# Altium PCB PCB2.PcbDoc
Units mm, origin at the board's own origin, x right, y up, seen from the top; angles counter-clockwise.
Board outline 90 x 90 mm, 2 copper layers (Top Layer, Bottom Layer); 25 components, 45 nets, 174 pads, 7 vias.
Unrouted connection lines stored in the file: 56.
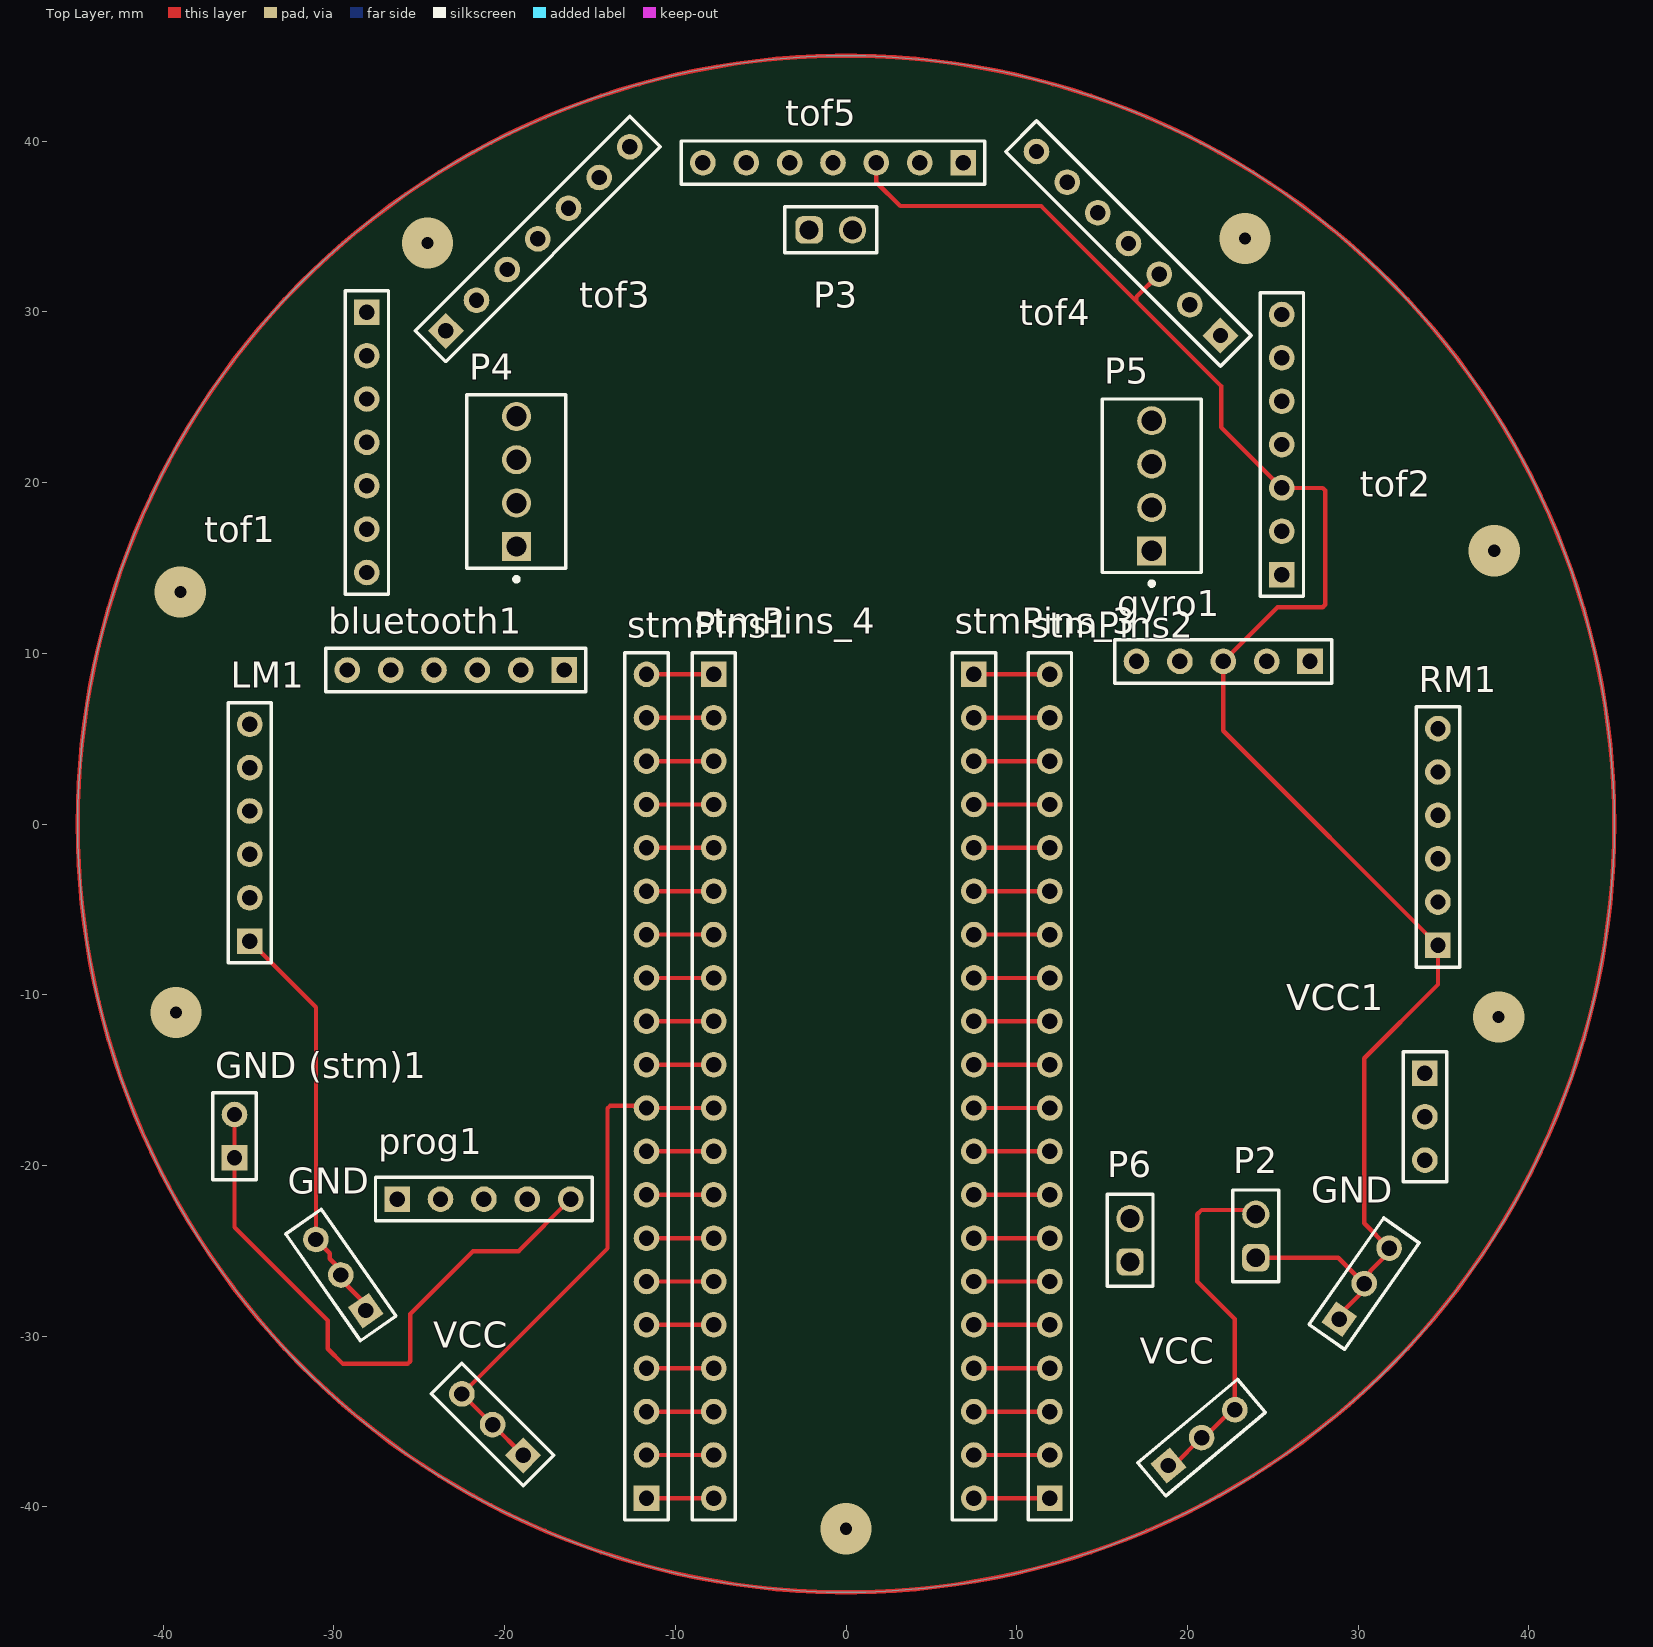
[diagram p0: Top Layer view]
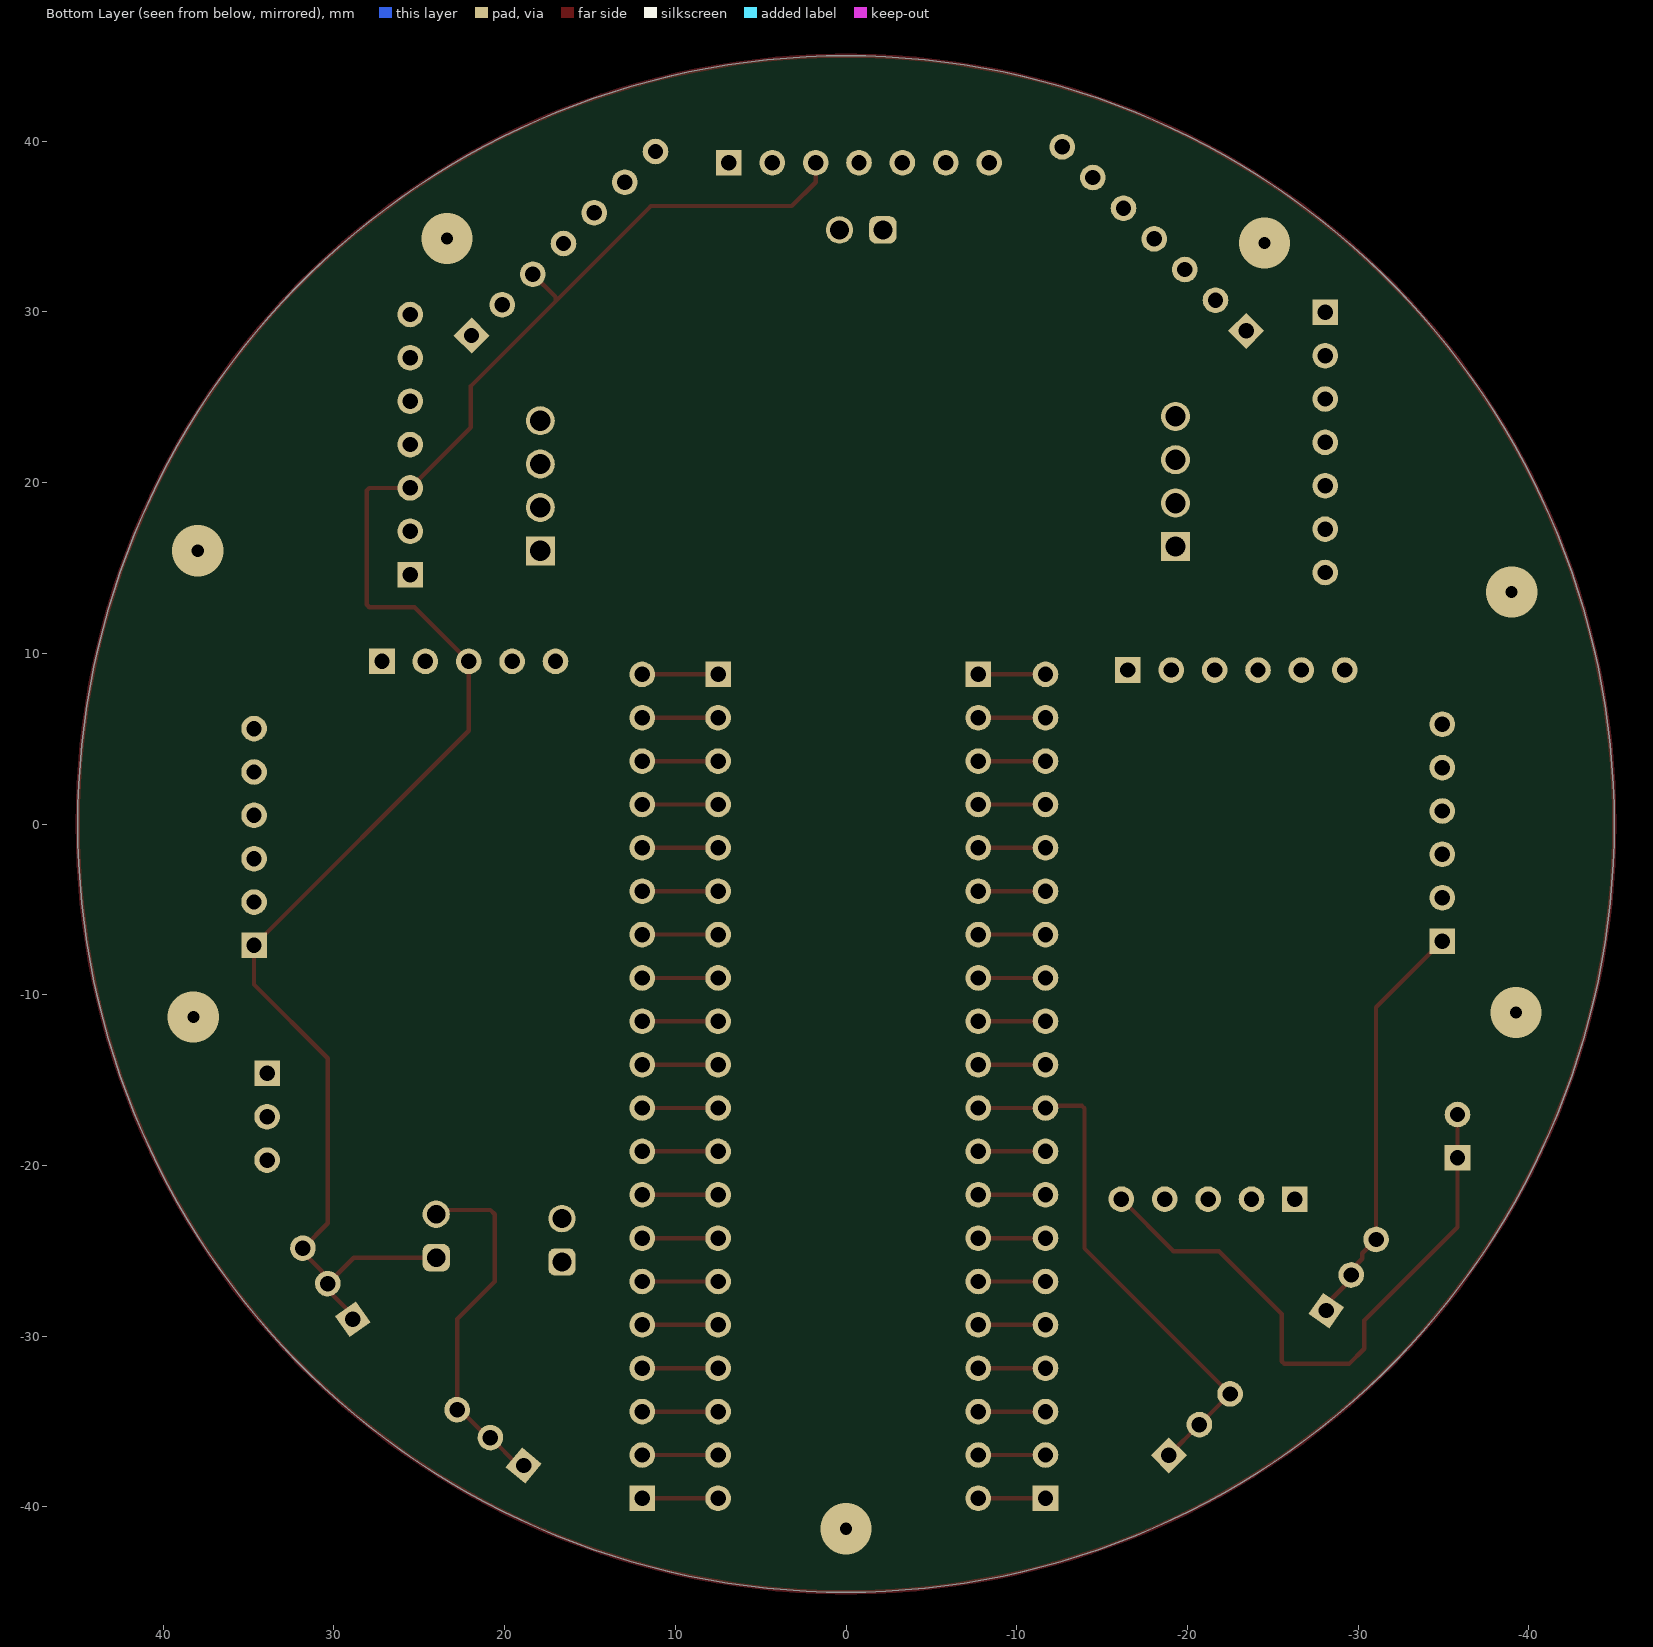
[diagram p1: Bottom Layer view, seen from below]

## Layer stack, top to bottom
Top Solder: solder mask 0.0102, Solder Resist, Dk 3.5
Top Layer: signal copper 0.0356
Dielectric 1: dielectric 0.32, FR-4, Dk 4.8
Bottom Layer: signal copper 0.0356
Bottom Solder: solder mask 0.0102, Solder Resist, Dk 3.5

## Board outline
-45,0 ccw(c0,0) 0,-45 ccw(c0,0) 45,0 ccw(c0,0) 0,45 ccw(c0,0)

## Design rules (kind name [scope] priority, off if disabled: settings)
Clearance [All] p1: gap=0.254 ignorepadtopadclearanceinfootprint=FALSE except(0: Arc-Hole Track-Hole SMDPad-Hole THPad-Hole Via-Hole Fill-Hole Poly-Hole Region-Hole Text-Hole)
PolygonConnect [All] p1: connectstyle=Relief reliefconductorwidth=0.254 reliefentries=4 polygonreliefangle="90 Angle" airgapwidth=0.254
RoutingVias [All] p1: holewidth=0.711 width=1.27 viastyle="Through Hole" minholewidth=0.711 minwidth=1.27 maxholewidth=0.711 maxwidth=1.27
SolderMaskExpansion [All] p1: expansion=0.102 istentingtop=FALSE
Width [All] p1: maxlimit=0.254 minlimit=0.254 preferedwidth=0.254
30 further rules are at their usual default settings.

## Classes and differential pairs
component class Sheet1: bluetooth1 GND "GND " "GND (stm)1" gyro1 LM1 prog1 RM1 stm1 stmPins1 stmPins2 stmPins_3 stmPins_4 tof1 tof2 tof3 tof4 tof5 VCC VCC1

## Components (designator, comment, footprint, x,y, rotation, side; value= is the part's Value field where it differs from the comment)
bluetooth1 "Header 6" HDR1X6 -16.51,9.017 r180 top
GND "Header 3" HDR1X3 28.896,-29.005 r55 top
GND "Header 3" HDR1X3 -28.134,-28.497 r125 top
"GND (stm)1" "Header 2" HDR1X2 -35.814,-19.558 r90 top
gyro1 "Header 5" HDR1X5 27.178,9.525 r180 top
LM1 "Header 6" HDR1X6 -34.925,-6.858 r90 top
P2 "61300211121" 61300211121 24.003,-24.13 r90 top
P3 "61300211121" 61300211121 -0.889,34.798 r0 top
P4 "22-27-2041" MOLX-22-27-2041_V -19.304,20.066 r270 top
P5 "22-27-2041" MOLX-22-27-2041_V 17.907,19.812 r270 top
P6 "61300211121" 61300211121 16.637,-24.384 r90 top
prog1 "Header 5" HDR1X5 -26.289,-21.971 r0 top
RM1 "Header 6" HDR1X6 34.671,-7.112 r90 top
stmPins1 "Header 20" HDR1X20 -11.684,-39.497 r90 top
stmPins2 "Header 20" HDR1X20 11.938,-39.497 r90 top
stmPins_3 "Header 20" HDR1X20 7.493,8.763 r270 top
stmPins_4 "Header 20" HDR1X20 -7.747,8.763 r270 top
tof1 "Header 7" HDR1X7 -28.067,29.972 r270 top
tof2 "Header 7" HDR1X7 25.527,14.605 r90 top
tof3 "Header 7" HDR1X7 -23.44,28.884 r45 top
tof4 "Header 7" HDR1X7 21.934,28.612 r135 top
tof5 "Header 7" HDR1X7 6.858,38.735 r180 top
VCC "Header 3" HDR1X3 -18.905,-36.975 r135 top
VCC "Header 3" HDR1X3 18.882,-37.574 r40 top
VCC1 "Header 3" HDR1X3 33.909,-14.605 r270 top

## Footprints (in the part's own frame and the unit in brackets; to place one, negate y for a bottom-side part, rotate by r counter-clockwise, add the part's x,y. Pads: shape width x height; smd on the part's side, far side on the other; paste and mask are expansions set on the pad)
61300211121 [mm] "Pin Header, pitch 2.54 mm, THT, Vertical, single row, 2p"
  rrect50% 1.6x1.6 hole 1.1: 1(-1.27,0)
  round 1.6 hole 1.1: 2(1.27,0)
  silkscreen extent -2.69,-1.34 2.69,1.34, body extent -2.54,-1.27 2.54,1.27, height 8.57
HDR1X2 [mm] "Connector; Header; 2 Position"
  rect 1.5x1.5 hole 0.9: 1(0,0)
  round 1.5 hole 0.9: 2(2.54,0)
  silkscreen extent -1.27,-1.27 3.81,1.27
HDR1X3 [mm] "Connector; Header; 3 Position"
  rect 1.5x1.5 hole 0.9: 1(0,0)
  round 1.5 hole 0.9: 2(2.54,0) 3(5.08,0)
  silkscreen extent -1.27,-1.27 6.35,1.27
HDR1X5 [mm] "Connector; Header; 5 Position"
  rect 1.5x1.5 hole 0.9: 1(0,0)
  round 1.5 hole 0.9: 2(2.54,0) 3(5.08,0) 4(7.62,0) 5(10.16,0)
  silkscreen extent -1.27,-1.27 11.43,1.27
HDR1X6 [mm] "Connector; Header; 6 Position"
  rect 1.5x1.5 hole 0.9: 1(0,0)
  round 1.5 hole 0.9: 2(2.54,0) 3(5.08,0) 4(7.62,0) 5(10.16,0) 6(12.7,0)
  silkscreen extent -1.27,-1.27 13.97,1.27
HDR1X7 [mm] "Connector; Header; 7 Position"
  rect 1.5x1.5 hole 0.9: 1(0,0)
  round 1.5 hole 0.9: 2(2.54,0) 3(5.08,0) 4(7.62,0) 5(10.16,0) 6(12.7,0) 7(15.24,0)
  silkscreen extent -1.27,-1.27 16.51,1.27
HDR1X20 [mm] "Connector; Header; 20 Position"
  rect 1.5x1.5 hole 0.9: 1(0,0)
  round 1.5 hole 0.9: 2(2.54,0) 3(5.08,0) 4(7.62,0) 5(10.16,0) 6(12.7,0) 7(15.24,0) 8(17.78,0) 9(20.32,0) 10(22.86,0) 11(25.4,0) 12(27.94,0) 13(30.48,0) 14(33.02,0) 15(35.56,0) 16(38.1,0) 17(40.64,0) 18(43.18,0) 19(45.72,0) 20(48.26,0)
  silkscreen extent -1.27,-1.27 49.53,1.27
MOLX-22-27-2041_V [mm] "CONN, 4-Leads, Body 10.16x5.8mm, Pitch 2.54mm"
  rect 1.7x1.7 hole 1.19: 1(3.81,0)
  round 1.7 hole 1.19: 2(1.27,0) 3(-1.27,0) 4(-3.81,0)
  silkscreen extent -5.08,-2.9 5.85,2.9, body extent -5.08,-2.9 5.08,2.9, height 11.7

## Part data
bluetooth1 LM1 RM1: "Header, 6-Pin", LatestRevisionDate=17-Jul-2002, LatestRevisionNote="Re-released for DXP Platform.", Publisher="Altium Limited"
GND GND VCC VCC VCC1: "Header, 3-Pin", LatestRevisionDate=17-Jul-2002, LatestRevisionNote="Re-released for DXP Platform.", Publisher="Altium Limited"
"GND (stm)1": "Header, 2-Pin", LatestRevisionDate=17-Jul-2002, LatestRevisionNote="Re-released for DXP Platform.", Publisher="Altium Limited"
gyro1 prog1: "Header, 5-Pin", LatestRevisionDate=17-Jul-2002, LatestRevisionNote="Re-released for DXP Platform.", Publisher="Altium Limited"
P2 P3 P6: library part CMP-1712-00002-5, Color=Black, Contact Resistance=20mΩ, Current Rating=3A, Max Operating Temperature=125°C, Min Operating Temperature=-40°C, Operating Supply Voltage=250V, Connector Type="Male Pin", Contact Gender=Male, Contact Material=Copper, Contact Mating Length=5.9944mm, Contact Plating=Gold, Gender=Male, Height=8.94mm, Housing Material=PBT, Lead Free="Lead Free", Lead Pitch=2.54mm, Mount="Through Hole", NexarPartId=20081794, Number of Contacts=2, Number of Pins=2, Number of Positions=2, Number of Rows=1, Orientation=Vertical, Packaging=Bulk, Pitch=2.54mm, REACH SVHC="No SVHC", RoHS=Compliant, Termination="Through Hole", Voltage Rating=250V
P4 P5: library part CMP-2000-05243-1, "Male Header, Pitch 2.54 mm, 1 x 4 Position, Height 11.7 mm, Tail Length 3.56 mm, RoHS, Bulk", Current Rating=4A, Manufacturer=Molex, Operating temperature=0degCto+75degC, Voltage Rating=250V, Contact Material=Tinplatedbrass, Datasheet URL=http://www.molex.com/pdm_docs/sd/022272041_sd.pdf, Datasheet Version="Rev. F, 06/2009", Housing Material=Nylon(UL94V-0), Manufacturer URL=http://www.molex.com/
stmPins1 stmPins2 stmPins_3 stmPins_4: "Header, 20-Pin", LatestRevisionDate=17-Jul-2002, LatestRevisionNote="Re-released for DXP Platform.", Publisher="Altium Limited"
tof1 tof2 tof3 tof4 tof5: "Header, 7-Pin", LatestRevisionDate=17-Jul-2002, LatestRevisionNote="Re-released for DXP Platform.", Publisher="Altium Limited"

## Via types
v1: diameter 3, hole 0.711, Top Layer to Bottom Layer, 7 vias

## Nets (pads, with @x,y where several pads share a name; then routed paths per layer and width w, separated by ;. In a path a pad name is that pad's centre, name@x,y a point inside that pad or via, vN(x,y) a via of type N, cw(c..) or ccw(c..) an arc to the next point about the centre after c; other vN are vias at no path point)
5V: bluetooth1.5 gyro1.4 LM1.4 P2.2 RM1.4 stmPins1.10 stmPins_4.11 tof1.2 tof2.2 tof3.2 tof3.6 tof4.2 tof5.2 VCC.1 VCC.2 VCC.3 | length 52.9
  Top Layer w0.254: VCC.1@-18.905,-36.975 -20.701,-35.179 -22.497,-33.383 -13.97,-24.856 -13.97,-16.659 -13.821,-16.51 -11.811,-16.51 stmPins1.10 stmPins_4.11 ; VCC.1@18.882,-37.574 19.195,-37.574 20.828,-35.941 20.985,-35.941 22.617,-34.308 22.774,-34.308 22.774,-28.997 20.574,-26.797 20.574,-22.86 20.828,-22.606 23.749,-22.606 P2.2
6V: P3.2 P6.1
GND: bluetooth1.4 GND.1 GND.2 GND.3 gyro1.3 LM1.1 P2.1 RM1.1 tof1.3 tof2.3 tof3.3 tof4.3 tof5.3 | length 131.3
  Top Layer w0.254: LM1.1 -31.048,-10.735 -31.048,-24.335 -30.235,-25.148 -30.235,-25.461 -29.591,-26.105 -29.591,-26.416 -29.591,-26.67 -28.134,-28.127 GND.1@-28.134,-28.497 ; tof5.3 1.778,37.592 3.175,36.195 11.43,36.195 17.018,30.607 ; tof4.3 17.018,30.88 17.018,30.607 ; P2.1 28.829,-25.4 GND.2@30.353,-26.924 ; GND.1@28.896,-29.005 28.896,-28.762 30.115,-27.543 30.115,-27.162 GND.2@30.353,-26.924 ; 17.018,30.607 21.971,25.654 21.971,23.241 tof2.3 27.918,19.685 28.067,19.536 28.067,12.849 27.918,12.7 25.273,12.7 gyro1.3 22.098,5.461 RM1.1 34.671,-9.398 30.353,-13.716 30.353,-23.386 31.81,-24.843 31.81,-25.086 30.708,-26.188 30.708,-26.232 30.353,-26.587 GND.2@30.353,-26.924
lm_in_01: P5.1 stmPins2.9 stmPins_3.12 | length 4.4
  Top Layer w0.254: stmPins_3.12 stmPins2.9
lm_motor_out: LM1.5 LM1.6 P4.1 P4.2
lm_pwm: P5.2 stmPins2.16 stmPins_3.5 | length 4.4
  Top Layer w0.254: stmPins_3.5 stmPins2.16
Netbluetooth1_2: bluetooth1.2 stmPins1.7 stmPins_4.14 | length 3.9
  Top Layer w0.254: stmPins1.7 stmPins_4.14
Netbluetooth1_3: bluetooth1.3 stmPins1.8 stmPins_4.13 | length 3.9
  Top Layer w0.254: stmPins1.8 stmPins_4.13
"NetGND (stm)1_1": "GND (stm)1.1" "GND (stm)1.2" prog1.5 stmPins2.19 stmPins_3.2 | length 40.6
  Top Layer w0.254: -35.814,-17.018 -35.814,-19.558 -35.814,-23.622 -30.353,-29.083 -30.353,-30.734 -29.464,-31.623 -25.676,-31.623 -25.527,-31.474 -25.527,-28.702 -21.844,-25.019 -19.177,-25.019 prog1.5 ; stmPins_3.2 stmPins2.19
Netgyro1_1: gyro1.1 stmPins1.15 stmPins_4.6 | length 3.9
  Top Layer w0.254: stmPins1.15 stmPins_4.6
Netgyro1_2: gyro1.2 stmPins1.16 stmPins_4.5 | length 3.9
  Top Layer w0.254: stmPins1.16 stmPins_4.5
NetLM1_2: LM1.2 stmPins2.2 stmPins_3.19 | length 4.4
  Top Layer w0.254: stmPins_3.19 stmPins2.2
NetLM1_3: LM1.3 stmPins2.1 stmPins_3.20 | length 4.4
  Top Layer w0.254: stmPins_3.20 stmPins2.1
NetP3_1: P3.1 P6.2
Netprog1_2: prog1.2 stmPins2.18 stmPins_3.3 VCC1.1 VCC1.2 VCC1.3 | length 4.4
  Top Layer w0.254: stmPins_3.3 stmPins2.18
Netprog1_3: prog1.3 stmPins2.7 stmPins_3.14 | length 4.4
  Top Layer w0.254: stmPins_3.14 stmPins2.7
Netprog1_4: prog1.4 stmPins2.6 stmPins_3.15 | length 4.4
  Top Layer w0.254: stmPins_3.15 stmPins2.6
NetRM1_2: RM1.2 stmPins2.4 stmPins_3.17 | length 4.4
  Top Layer w0.254: stmPins_3.17 stmPins2.4
NetRM1_3: RM1.3 stmPins2.3 stmPins_3.18 | length 4.4
  Top Layer w0.254: stmPins_3.18 stmPins2.3
NetstmPins1_1: stmPins1.1 stmPins_4.20 | length 3.9
  Top Layer w0.254: stmPins1.1 stmPins_4.20
NetstmPins1_2: stmPins1.2 stmPins_4.19 | length 3.9
  Top Layer w0.254: stmPins1.2 stmPins_4.19
NetstmPins1_3: stmPins1.3 stmPins_4.18 | length 3.9
  Top Layer w0.254: stmPins1.3 stmPins_4.18
NetstmPins1_4: stmPins1.4 stmPins_4.17 | length 3.9
  Top Layer w0.254: stmPins1.4 stmPins_4.17
NetstmPins1_5: stmPins1.5 stmPins_4.16 tof1.6 | length 3.9
  Top Layer w0.254: stmPins1.5 stmPins_4.16
NetstmPins1_6: stmPins1.6 stmPins_4.15 tof2.6 | length 3.9
  Top Layer w0.254: stmPins1.6 stmPins_4.15
NetstmPins1_9: stmPins1.9 stmPins_4.12 tof5.6 | length 3.9
  Top Layer w0.254: stmPins1.9 stmPins_4.12
NetstmPins1_11: stmPins1.11 stmPins_4.10 tof4.6 | length 3.9
  Top Layer w0.254: stmPins1.11 stmPins_4.10
NetstmPins1_12: stmPins1.12 stmPins_4.9 | length 3.9
  Top Layer w0.254: stmPins1.12 stmPins_4.9
NetstmPins1_13: stmPins1.13 stmPins_4.8 | length 3.9
  Top Layer w0.254: stmPins1.13 stmPins_4.8
NetstmPins1_14: stmPins1.14 stmPins_4.7 | length 3.9
  Top Layer w0.254: stmPins1.14 stmPins_4.7
NetstmPins1_17: stmPins1.17 stmPins_4.4 | length 3.9
  Top Layer w0.254: stmPins1.17 stmPins_4.4
NetstmPins1_18: stmPins1.18 stmPins_4.3 | length 3.9
  Top Layer w0.254: stmPins1.18 stmPins_4.3
NetstmPins1_19: stmPins1.19 stmPins_4.2 | length 3.9
  Top Layer w0.254: stmPins1.19 stmPins_4.2
NetstmPins1_20: stmPins1.20 stmPins_4.1 | length 3.9
  Top Layer w0.254: stmPins1.20 stmPins_4.1
NetstmPins2_5: stmPins2.5 stmPins_3.16 | length 4.4
  Top Layer w0.254: stmPins_3.16 stmPins2.5
NetstmPins2_8: stmPins2.8 stmPins_3.13 | length 4.4
  Top Layer w0.254: stmPins_3.13 stmPins2.8
NetstmPins2_10: stmPins2.10 stmPins_3.11 | length 4.4
  Top Layer w0.254: stmPins_3.11 stmPins2.10
NetstmPins2_12: stmPins2.12 stmPins_3.9 | length 4.4
  Top Layer w0.254: stmPins_3.9 stmPins2.12
NetstmPins2_13: stmPins2.13 stmPins_3.8 | length 4.4
  Top Layer w0.254: stmPins_3.8 stmPins2.13
NetstmPins2_14: stmPins2.14 stmPins_3.7 tof1.5 tof2.5 tof3.5 tof4.5 tof5.5 | length 4.4
  Top Layer w0.254: stmPins_3.7 stmPins2.14
NetstmPins2_15: stmPins2.15 stmPins_3.6 tof1.4 tof2.4 tof3.4 tof4.4 tof5.4 | length 4.4
  Top Layer w0.254: stmPins_3.6 stmPins2.15
NetstmPins2_20: stmPins2.20 stmPins_3.1 | length 4.4
  Top Layer w0.254: stmPins_3.1 stmPins2.20
rm_in_01: P5.3 stmPins2.11 stmPins_3.10 | length 4.4
  Top Layer w0.254: stmPins_3.10 stmPins2.11
rm_motor_out: P4.3 P4.4 RM1.5 RM1.6
rm_pwm: P5.4 stmPins2.17 stmPins_3.4 | length 4.4
  Top Layer w0.254: stmPins_3.4 stmPins2.17
pads on no net: bluetooth1.1 bluetooth1.6 gyro1.5 prog1.1 tof1.1 tof1.7 tof2.1 tof2.7 tof3.1 tof3.7 tof4.1 tof4.7 tof5.1 tof5.7
copper on no net: | length 282.7
  Top Layer w0.254: 45,0 ccw(c0,0) 45,0
  other v1: 0,-41.275 38.227,-11.303 -39.243,-11.049 -38.989,13.589 37.973,16.002 -24.511,34.036 23.368,34.29